# Altium PCB Circular PCB.PcbDoc (part 2 of 4)
Units mm, origin at the board's own origin, x right, y up, seen from the top; angles counter-clockwise.
Board outline 100 x 100 mm, 6 copper layers (Top Layer, GND (Top), X, Y, GND (Bot), Bottom Layer), stack 1.599 mm thick; 185 components, 119 nets, 581 pads, 159 vias.
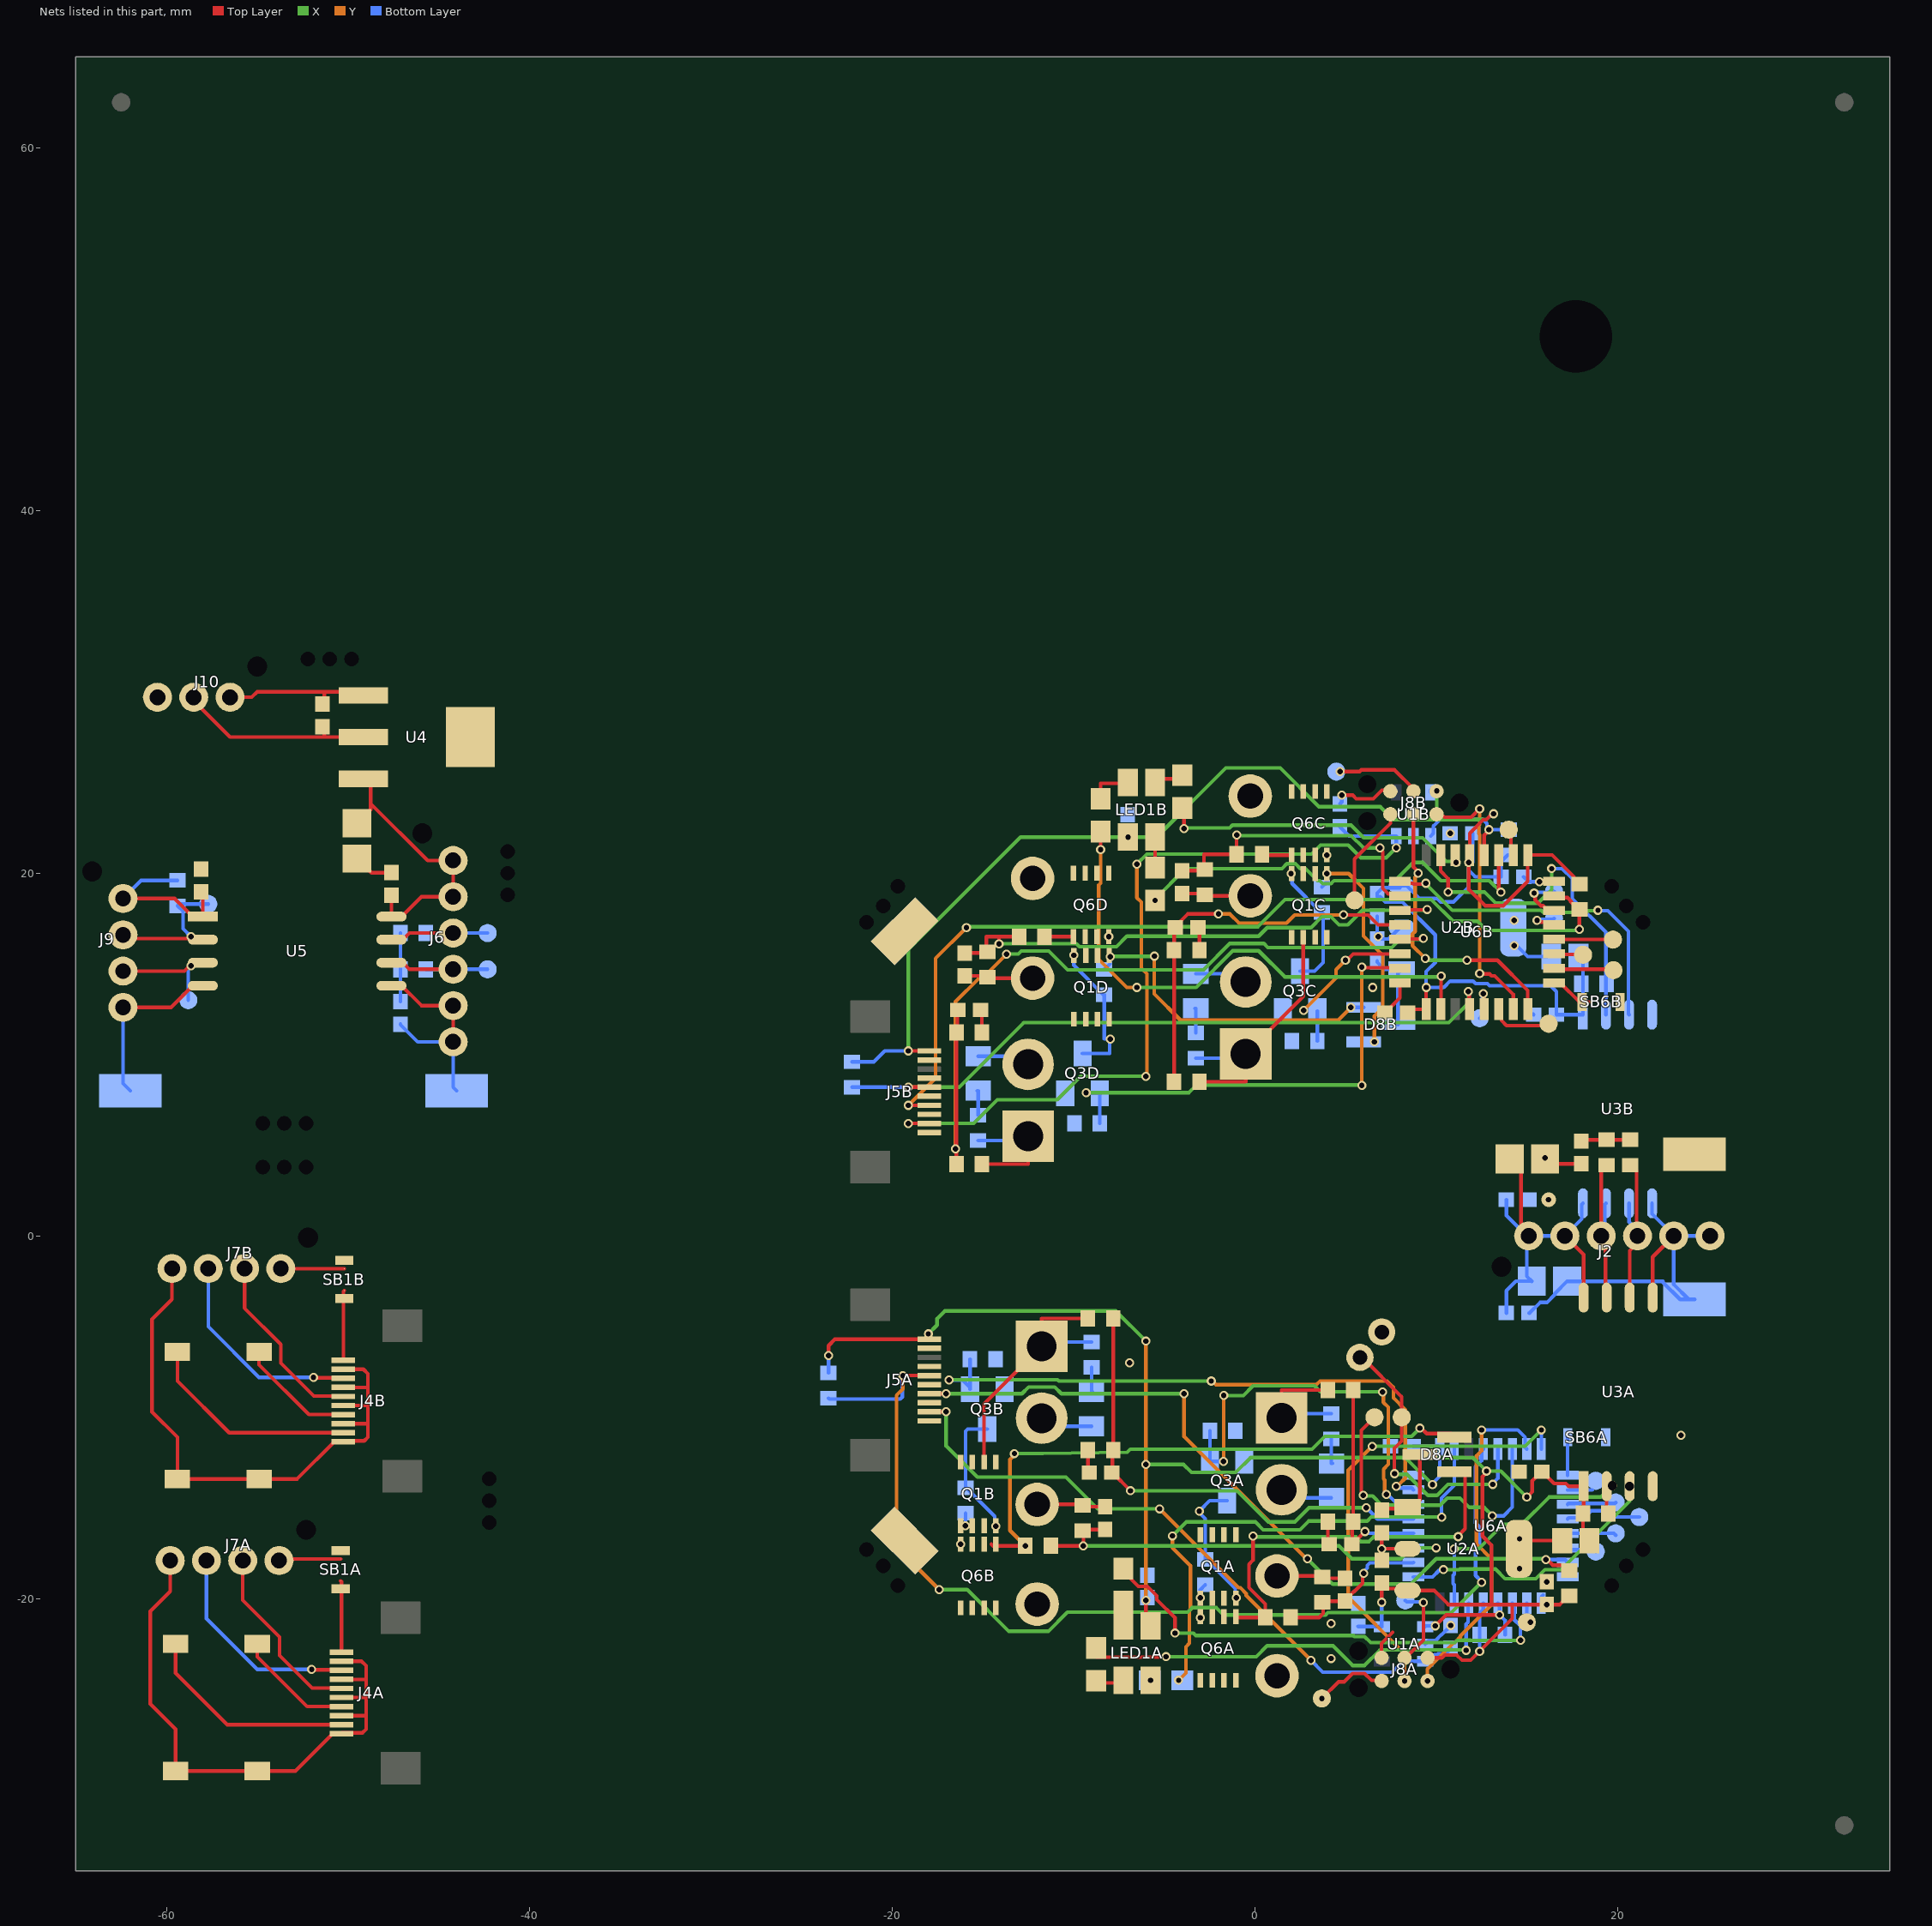
[diagram p6: the nets of this part, all layers, seen from the top]

## Part data
A1: library part "Misc PCB", "PCB (Bare Board)", Supplier Part Number 1="KDA Rev B", Class="PCB BOM Entry", Created=31/05/2013, Last_Updated=31/05/2013, Notes=-, Source="Misc PCB"
C1A C1B C2A C2B C3A C3B C5A C5B C7A C7B C8A C8B C9A C9B C10A C10B C11A C11B C12A C12B C12C C12D C13A C13B C13C C13D C14 C15 C16 C18 C19: library part FEC882-0023, "Capacitor MLC 100nF 50V X7R 10% CAPC1608X08M", Dielectric=X7R, Manufacturer=Murata, ManuPartNo=GRM188R71H104KA93D, Supplier Part Number 1=8820023, Tolerance=10%, Voltage=50V, Class="Capacitor MLC", Cost 1+=0.064, Cost 1K+=0.039, Created=25/01/2013, Last_Updated=25/01/2013, Life=V, RoHS=Y, Source=FEC882-0023, Supplier 1=Farnell
C4A C4B: library part FEC2494476, "Capacitor MLC 100uF 6.3V X5R 20% CAPC2012X15M", Dielectric=X5R, ManuPartNo=GRM21BR60J107ME15L, Supplier Part Number 1=2494476, Tolerance=20%, Voltage=6.3V, Class="Capacitor MLC", ComponentLink1Description=Datasheet, ComponentLink1URL="C:\Altium SANDBOX\Component Database\Datasheet\4459603.pdf", Cost 1+=0.829, Cost 1K+=0.341, Created=10/01/2026, Last_Updated=10/01/2026, Life=V, RoHS=Y, Source=FEC2494476, Supplier 1=Farnell
C6A C6B C17: library part Mouser81-GRM21BR71A106KE51, "Capacitor MLC 10uF10V X7R 10% CAPC2012X15M", Dielectric=X7R, Manufacturer=Murata, ManuPartNo=GRM21BR71A106KE51L, Supplier Part Number 1=81-GRM21BR71A106KE51, Tolerance=10%, Voltage=10V, Class="Capacitor MLC", Cost 1+=0.189, Cost 1K+=0.046, Created=21/12/2016, Last_Updated=21/12/2016, Life=V, RoHS=Y, Source=Mouser81-GRM21BR71A106KE51, Supplier 1=Mouser
D8A D8B: library part FEC146-7518, "Diode Schottky BAT54C SOT-23", Manufacturer=Fairchild, ManuPartNo=BAT54C, Supplier Part Number 1=1467518, Class="Diode Schottky", ComponentLink1Description=Datasheet, ComponentLink1URL="C:\Altium SANDBOX\Component Database\Datasheet\BAT54 Fairchild.pdf", Cost 1+=0.117, Cost 1K+=0.0297, Created=16/12/2013, If (mA)=200, Last_Updated=26/06/2018, Life=V, Ptot (mW)=290, RoHS=Y, Source=FEC146-7518, Supplier 1=Farnell, Vf=0.8V, Vr (V)=30V
FID1 FID2 FID3 FID4 FID5 FID6: library part "Misc FIDT", "Fiducial 1mm Dot Component Side", Supplier Part Number 1=FIDT, Class="Fiducial Dot", Created=31/05/2013, Last_Updated=31/05/2013, Source="Misc FIDT", Supplier 1=Misc
J1A J1B J1C J1D: library part FEC1756696, "Connector 2 Way Mini-Fit 5566 Series", Manufacturer=Molex, ManuPartNo=39-31-0020, Supplier Part Number 1=1756696, Class=Connector, ComponentLink1Description=Datasheet, ComponentLink1URL="C:\Altium SANDBOX\Component Database\Datasheet\39-31-0020.pdf", Cost 1+=0.39, Cost 1K+=0.283, Created=06/02/2018, Last_Updated=06/02/2018, Life=V, Orient=Vertical, Pin Count=2, RoHS=Y, Source=FEC1756696, Supplier 1=Farnell
J2 J6: library part FEC183-0743, "Connector 6 Way Vertical B06B-PASK-1 (LF) (SN) 2mm Pitch", Manufacturer=JST, ManuPartNo="B06B-PASK-1 (LF) (SN)", Supplier Part Number 1=1830743, Class=Connector, Cost 1+=0.55, Cost 1K+=0.2, Created=21/06/2013, Last_Updated=21/06/2013, Life=V, Orient=Vertical, Pin Count=6, Pitch=2mm, RoHS=Y, Source=FEC183-0743, Supplier 1=Farnell
J3A J3B J3C J3D: library part FEC949-2003, "Connector 2 Way Vertical JST B2P-VH(LF)(SN) 3.96mm Pitch", Manufacturer=JST, ManuPartNo=B2P-VH(LF)(SN), Supplier Part Number 1=9492003, Class=Connector, Cost 1+=0.128, Cost 1K+=0.074, Created=13/06/2013, Last_Updated=13/06/2013, Life=V, Orient#=Vertical, Pin Count=2, Pitch=3.96mm, RoHS=Y, Source=FEC949-2003, Supplier 1=Farnell
J4A J4B J5A J5B: library part FEC1324540, "Connector 10W FFC/FPC 0.5mm SM ZIF", Manufacturer=Hirose, ManuPartNo=FH12-10S-0.5SH(55), Supplier Part Number 1=1324540, Class=Connector, ComponentLink1Description=Datasheet, ComponentLink1URL="C:\Altium SANDBOX\Component Database\Datasheet\Hirose FH12 Series.pdf", Cost 1+=1.02, Cost 1K+=0.563, Created=28/02/2020, Last_Updated=28/02/2020, Life=V, Orient=Horizontal, Pin Count=10, RoHS=Y, Source=FEC1324540, Supplier 1=Farnell
J7A J7B J9: library part RS512-8608, "Connector 4 Way Vertical JST B04B-PASK-1 (LF) (SN) 2mm Pitch", Manufacturer=JST, ManuPartNo="B04B-PASK-1 (LF) (SN)", Supplier Part Number 1=512-8608, Class=Connector, Cost 1+=0.26, Cost 1K+=0.24, Created=05/06/2013, Last_Updated=05/06/2013, Life=V, Orient=Vertical, Pin Count=4, Pitch=2mm, RoHS=Y, Source=RS512-8608, Supplier 1=RSComponents
J8A J8B: library part TC2030-IDC-NL, "TC2030 Tag Connect Programmer Connection - Non BOM part", Manufacturer="Tag Connect", ComponentLink1Description=Datasheet, ComponentLink1URL="C:\Altium SANDBOX\Component Database\Datasheet\TC2030-CTX.pdf", Created=28/09/2025, Last_Updated=28/09/2025, Life=V, Orient=Vertical, Pin Count=6, RoHS=Y, Source=TC2030-IDC-NL
J10: library part FEC183-0736, "Connector 3 Way Vertical 2mm Pitch", Manufacturer=JST, ManuPartNo=B03B-PASK-1, Supplier Part Number 1=1830736, Class=Connector, Cost 1+=0.34, Cost 1K+=0.118, Created=09/08/2013, Last_Updated=09/08/2013, Life=V, Orient=Vertical, Pin Count=3, Pitch=2mm, RoHS=Y, Source=FEC183-0736, Supplier 1=Farnell
LED1A LED1B: library part FEC2401105, "LED RGB, SMD, 2.4mm, 115 °", Manufacturer=Wurth, ManuPartNo=ASMB-MTB0-0A3A2, Supplier Part Number 1=2401105, Class=LED, ComponentLink1Description=Datasheet, ComponentLink1URL="C:\Altium SANDBOX\Component Database\Datasheet\2343968.pdf", Cost 1+=0.278, Cost 1K+=0.141, Created=09/03/2018, IF Max (mA)=20, IF Typ (mA)=20, Last_Updated=09/03/2018, Life=V, RoHS=Y, Source=FEC2401105, Supplier 1=Farnell, View Angle=115
LED2A LED2B LED2C LED2D: library part RS692-0907, "LED 2.0x1.25mm GREEN 0805 LTST-C170KGKT", Manufacturer=Liteon, ManuPartNo=LTST-C170KGKT, Supplier Part Number 1=692-0907, Class="LED 0805 Green", ComponentLink1Description=Datasheet, ComponentLink1URL="C:\Altium SANDBOX\Component Database\Datasheet\LTST-C170KGKT.pdf", Cost 1+=0.169, Cost 1K+=0.071, Created=05/08/2013, IF Max (mA)=80, IF Typ (mA)=30, Last_Updated=05/08/2013, Life=V, RoHS=Y, Source=RS692-0907, Supplier 1=RSComponents, View Angle=130
Q1A Q1B Q1C Q1D Q6A Q6B Q6C Q6D: library part FEC3934789, "Power MOSFET, P Channel, 30 V, 15.2 A, 0.0111 ohm, MLPAK33, Surface Mount", Manufacturer=NEXPERIA, ManuPartNo=PXP012-30QLJ, Supplier Part Number 1=3934789, Class="Transistor MOSFET P", ComponentLink1Description=Datasheet, ComponentLink1URL="C:\Altium SANDBOX\Component Database\Datasheet\3679934.pdf", Cost 1+=0.598, Cost 1K+=0.207, Created=24/09/2025, Id=8.9, Last_Updated=24/09/2025, Life=V, Pd (mW)=1700, Rds(on)=0.0111, RoHS=Y, Source=FEC3934789, Supplier 1=Farnell, Vds=30, Vgs=25
Q3A Q3B Q3C Q3D: library part CMP-013-00021-3, "N-Channel Logic Level Enhancement Mode Field Effect Transistor, 220 mA, 50 V, -55 to 150 degC, 3-Pin SOT-23, RoHS, Tape and Reel", Case/Package=TO-236-3, Input Capacitance=27pF, Manufacturer=Fairchild, Max Operating Temperature=150°C, Min Operating Temperature=-55°C, Nominal Dual Supply Voltage=50V, Package Description="3-Pin Small Outline Transistor, Body 2.92 x 1.325 mm, Pitch 0.95 mm", Package Quantity=1, Package Reference=SOT23-3, Package Version="Rev. 12, 03/2016", Power=360mW, Resistance=0.7Ohm, Datasheet URL=https://www.fairchildsemi.com/datasheets/BS/BSS138.pdf, Datasheet Version="Rev. C, 10/2005", Elements=1, Mounting Technology=SM, Nominal Vgs=1.3V, Packaging=TapeandReel, Pins=3, Rds On Max=3.5Ohm, RoHS Compliant=True, Typical Rise Time=9ns
R1A R1B R1C R1D R4A R4B R4C R4D R10A R10B R12A R12B R12C R12D R15 R37A R37B: library part PanasonicERA3AEB103V, "SMD Chip Resistor, Thin Film, 10 kohm, 75 V, 0603 [1608 Metric], 100 mW, ± 0.1%, ERA3A Series", Manufacturer=Panasonic, ManuPartNo=ERA3AEB103V, Power=100mW, Supplier Part Number 1=1577619, Tolerance=0.1%, Voltage=75V, Class=Resistor, ComponentLink1Description=Datasheet, ComponentLink1URL="C:\Altium SANDBOX\Component Database\Datasheet\Panasonic Resistors.pdf", Cost 1+=0.237, Cost 1K+=0.053, Created=27/02/2018, Last_Updated=27/02/2018, Life=V, RoHS=Y, Source=PanasonicERA3AEB103V, Supplier 1=Farnell
R2A R2B R2C R2D R11A R11B R11C R11D: library part PanasonicERA3AEB303V, "SMD Chip Resistor, Thin Film, 30 kohm, 75 V, 0603 [1608 Metric], 100 mW, ± 0.1%, ERA3A Series", Manufacturer=Panasonic, ManuPartNo=ERA3AEB303V, Power=100mW, Supplier Part Number 1=1670196, Tolerance=0.1%, Voltage=75V, Class=Resistor, ComponentLink1Description=Datasheet, ComponentLink1URL="C:\Altium SANDBOX\Component Database\Datasheet\Panasonic Resistors.pdf", Cost 1+=0.0538, Cost 1K+=0.0349, Created=19/09/2025, Last_Updated=19/09/2025, Life=V, RoHS=Y, Source=PanasonicERA3AEB303V, Supplier 1=Farnell
R3A R3B R3C R3D: library part FEC2421849, "SMD Chip Resistor, Thick Film, 1 kohm, 50 V, 0603 [1608 Metric], 100 mW, ± 1%, RC Series", Manufacturer=Yageo, ManuPartNo=RC0603FR-071KL, Power=100mW, Supplier Part Number 1=2421849, Tolerance=1%, Voltage=50V, Class=Resistor, ComponentLink1Description=Datasheet, ComponentLink1URL="C:\Altium SANDBOX\Component Database\Datasheet\Yageo RC_L Series.pdf", Cost 1+=0.002, Cost 1K+=0.001, Created=22/05/2018, Last_Updated=22/05/2018, Life=V, RoHS=Y, Source=FEC2421849, Supplier 1=Farnell
R5A R5B R6A R6B: library part FEC933-1174, "Resistor 39R 1% 50V RESC1608X06M", Manufacturer=Multicomp, ManuPartNo="MC 0.063W 0603 1% 39R", Supplier Part Number 1=9331174, Tolerance=1%, Voltage=50V, Class=Resistor, Cost 1+=0.021, Cost 1K+=0.015, Created=23/01/2013, Last_Updated=23/01/2013, Life=V, RoHS=Y, Source=FEC933-1174, Supplier 1=Farnell
R7A R7B: library part FEC933-0860, "Resistor 240R 1% 50V RESC1608X06M", Manufacturer=Multicomp, ManuPartNo="MC 0.063W 0603 1% 240R", Supplier Part Number 1=9330860, Tolerance=1%, Voltage=50V, Class=Resistor, Cost 1+=0.021, Cost 1K+=0.015, Created=23/01/2013, Last_Updated=23/01/2013, Life=V, RoHS=Y, Source=FEC933-0860, Supplier 1=Farnell
R8A R8B R9A R9B: library part FEC933-1247, "Resistor 4K7 1% 50V RESC1608X06M", Manufacturer=Multicomp, ManuPartNo="MC 0.063W 0603 1% 4K7", Supplier Part Number 1=9331247, Tolerance=1%, Voltage=50V, Class=Resistor, Cost 1+=0.021, Cost 1K+=0.015, Created=23/01/2013, Last_Updated=23/01/2013, Life=V, RoHS=Y, Source=FEC933-1247, Supplier 1=Farnell
R13 R14 R16 R17: library part Mouser603-RC0603FR-0762RL, "SMD Chip Resistor, Thick Film, 62 ohm, 75V, 0603 [1608 Metric], 100mW, ± 1%, RC Series", Manufacturer=Yageo, ManuPartNo=RC0603FR-0762RL, Power=100mW, Supplier Part Number 1=603-RC0603FR-0762RL, Tolerance=1%, Voltage=75V, Class=Resistor, ComponentLink1Description=Datasheet, ComponentLink1URL="C:\Altium SANDBOX\Component Database\Datasheet\Yageo RC_L Series.pdf", Cost 1+=0.074, Cost 1K+=0.002, Created=08/06/2018, Last_Updated=08/06/2018, Life=V, RoHS=Y, Source=Mouser603-RC0603FR-0762RL, Supplier 1=Mouser
R22A R22B R22C R22D: library part FEC933-1344, "Resistor 560R 1% 50V RESC1608X06M", Manufacturer=Multicomp, ManuPartNo="MC 0.063W 0603 1% 560R", Supplier Part Number 1=9331344, Tolerance=1%, Voltage=50V, Class=Resistor, Cost 1+=0.021, Cost 1K+=0.015, Created=23/01/2013, Last_Updated=23/01/2013, Life=V, RoHS=Y, Source=FEC933-1344, Supplier 1=Farnell
SB1A SB1B SB6A SB6B: library part "Solder Blob Open", "Solder Blob - Open 0603 SM pads", Created=13/10/2017, Last_Updated=13/10/2017, Life=V, Pin Count=2, RoHS=Y, Source="Solder Blob Open"
SW1A SW1B SW2A SW2B: library part FEC120-1422, "Switch SMD SPST-NO Vertical ITT/Cannon KSR231GLFS", Manufacturer=ITT/Cannon, ManuPartNo=KSR231GLFS, Supplier Part Number 1=1201422, Class="Switch SMD", Cost 1+=0.77, Cost 1K+=0.54, Created=18/09/2013, Last_Updated=18/09/2013, Life=V, Orient=Vertical, RoHS=Y, Source=FEC120-1422, Supplier 1=Farnell, Switch Type=SPST-NO
TP1A TP1B TP2A TP2B TP16A TP16B TP21 TP22: library part FEC2293786, "PCB Test Point S1751 Series, Surface Mount", Manufacturer=Harwin, ManuPartNo=S1751-46R, Supplier Part Number 1=2293786, Class=Connector, ComponentLink1Description=Datasheet, ComponentLink1URL="C:\Altium SANDBOX\Component Database\Datasheet\S1751-46R.pdf", Cost 1+=0.134, Cost 1K+=0.106, Created=16/10/2017, Last_Updated=01/12/2017, Life=V, Orient=Vertical, Pin Count=1, RoHS=Y, Source=FEC2293786, Supplier 1=Farnell
TP3A TP3B TP4A TP4B TP5A TP5B TP6A TP6B TP7A TP7B TP8A TP8B TP9A TP9B TP10A TP10B TP11A TP11B TP13A TP13B TP17 TP18 TP19 TP20: library part "Misc TP1", "Testpoint 1mm dia. Component side, no silk", Supplier Part Number 1=TP1, Class=Testpoint, Created=26/01/2013, Last_Updated=26/01/2013, Source="Misc TP1", Supplier 1=Misc
U1A U1B: library part FEC845-7255, "IC Supply Voltage Monitor, 2.93V TPS3828-33DBVT SOT23-5", Manufacturer=Texas, ManuPartNo=TPS3828-33DBVT, Supplier Part Number 1=8457255, Class="IC Sensor", ComponentLink1Description=Datasheet, ComponentLink1URL="C:\Altium SANDBOX\Component Database\Datasheet\TPS3828.pdf", Cost 1+=1.08, Cost 1K+=0.73, Created=10/06/2013, Last_Updated=10/06/2013, Life=V, RoHS=Y, Source=FEC845-7255, Supplier 1=Farnell
U2A U2B: library part CMP-06324-000085-1, "IC REG LIN 3.3V 100MA SOT223-3", Case/Package=SOT-223, Dropout Voltage=230mV, Max Input Voltage=26V, Max Operating Temperature=125°C, Min Current Limit=100mA, Min Input Voltage=2.5V, Min Operating Temperature=-40°C, Nominal Output Voltage=3.3V, Lead Free="Lead Free", Mount="Surface Mount", Number of Pins=3, Number of Regulators=1, Output Current=100mA, Output Type=Fixed, Output Voltage=3.3V, Packaging=Rail/Tube, REACH SVHC="No SVHC"
U3A U3B U5: library part CMP-04872-000132-1, "IC TRANSCEIVER FULL 1/1 8SOIC", Manuf Part No=ISO1042DWV, RoHS Compliant=Yes
U4: library part FEC210-0330, "IC Regulator LDO MIC5239-5.0YS SOT-223", Manufacturer=Micrel, ManuPartNo=MIC5239-5.0YS, Supplier Part Number 1=2100330, Class="IC LDO Regulator", ComponentLink1Description=Datasheet, ComponentLink1URL="C:\Altium SANDBOX\Component Database\Datasheet\MIC5239.pdf", Cost 1+=3.22, Cost 1K+=1.3, Created=23/01/2014, Last_Updated=23/01/2014, Life=V, RoHS=Y, Source=FEC210-0330, Supplier 1=Farnell
U6A U6B: library part CMP-12105-000012-1, "IC MCU 32BIT 16KB FLASH 32LQFP", Ambient Temperature Range High=+85°C, Ambient Temperature Range Low=-40°C, Frequency=32MHz, Manufacturer=STMicroelectronics, Manufacturer Part Number=STM32L011K4T6, Max Junction Temp=+105°C, Max Supply Voltage=3.6V, Min Supply Voltage=1.65V, Nominal Supply Current=500-1500uA, Package=LQFP32-5V, Temperature="-40°C to +85°C", Automotive=No, Category=IC, ComponentLink2Description=Datasheet, ComponentLink2URL=https://www.st.com/content/ccc/resource/technical/document/datasheet/42/c0/ab/e5/71/7a/47/0b/DM00206508.pdf/files/DM00206508.pdf/jcr:content/translations/en.DM00206508.pdf, Core Architecture="Arm Cortex-M0+", Data Bus Width=32bits, Device Class L1="Integrated Circuits (ICs)", Device Class L2="Embedded Processors and Controllers", Device Class L3=Microcontrollers, Digikey Description="IC MCU 32BIT 16KB FLASH 32LQFP", Height=1.6mm, Interface=I2C,SPI,UART,USART,IrDA, Ipc Land Pattern Name=QFP80P900X900X160-32, Lead Free=Yes, Memory Size=16KBytes, Memory Type=FLASH, Mouser Description="ARM Microcontrollers - MCU Ultra-low-power ARM Cortex-M0+ MCU with 16-Kbytes Flash, 32 MHz CPU", Number Of A/D Converters=1, Number Of Adc Channels=10, Number Of Cores=1, Number Of I2C Channels=1, Number of I/Os=26, Number Of Spi Channels=1, Number Of Timers/Counters=8, Number Of Uart Channels=2, Octopart=https://octopart.com/stm32l011k4t6-stmicroelectronics-71108062, Ram Size=2KBytes, RoHS=TRUE, Standoff Height=0.05mm, Temperature Range High=+85°C, Temperature Range Low=-40°C
Z1 Z2 Z4 Z5 Z6: library part "Misc_Breakout - 3 hole - short route", "Breakout - 3 hole - short route", Class="Free pads", Created=14/12/2020, Last_Updated=14/12/2020, Source="Misc_Breakout - 3 hole - short route", Supplier 1=Misc

## Free pads (board coordinates)
  round 0 hole 0.8: 0(-21.4,-17.3) 0(-21.4,17.3) 0(-20.475,-18.2) 0(-20.475,18.2) 0(-19.684,-19.273) 0(-19.684,19.273) 0(19.684,-19.273) 0(20.475,-18.2) 0(21.4,-17.3) breakout(19.684,19.273) breakout(20.475,18.2) breakout(21.4,17.3)
  round 1.5 hole 0.8: 1(5.8,-6.7) 1(7,-5.3)
  round 0 hole 4: 1(17.7,49.6)

## Via types
v1: diameter 0.5, hole 0.3, Top Layer to Bottom Layer, tented both sides, 155 vias
v2: diameter 0.5, hole 0.5, Top Layer to Bottom Layer, tented both sides, 2 vias
v3: diameter 0.8, hole 0.3, Top Layer to Bottom Layer, tented both sides, 2 vias

## Nets (pads, with @x,y where several pads share a name; then routed paths per layer and width w, separated by ;. In a path a pad name is that pad's centre, name@x,y a point inside that pad or via, vN(x,y) a via of type N, cw(c..) or ccw(c..) an arc to the next point about the centre after c; other vN are vias at no path point)
3V3: C18.1 J9.1 R15.2 U5.1 | length 9.6
  Top Layer w0.2: J9.1@-62.4,18.6 -59.551,18.6 -58.556,17.605 U5.1@-58.001,17.605 -58.001,18.876 C18.1@-58.1,18.975
  Bottom Layer w0.2: J9.1@-62.4,18.6 -61.4,19.6 R15.2@-59.4,19.6
3V3A: C1A.1 C3A.1 C4A.1 C7A.1 C9A.1 C10A.1 C11A.1 J5A.1 J8A.1 LED1A.1 R8A.2 R9A.2 R10A.2 R37A.2 U1A.5 U2A.3 U3A.1 U6A.1 U6A.5 U6A.17 | length 104.8
  Top Layer w0.2: v1(-23.5,-6.6) -23.5,-6.05 -23.15,-5.7 J5A.1@-17.95,-5.7 -18,-5.65 v1(-18,-5.4) ; v1(-6,-20.1) -6,-21.25 LED1A.1@-5.75,-21.5 ; v1(7,-20.2) C3A.1@7,-19.125 ; C3A.1@7,-19.15 7.25,-19.4 7.275,-19.4 7.314,-19.439 8.314,-19.439 U2A.3@8.425,-19.55 9.89,-19.55 10.665,-20.325 13.05,-20.325 ; U2A.3@8.299,-19.575 U2A.3@8.4,-19.575 ; J8A.1@9.53,-23.265 10.307,-23.265 10.47,-23.103 11.13,-23.103 11.425,-23.397 11.903,-23.397 v1(12.4,-22.9) 14.2,-21.1 14.2,-20.325 ; v1(12.776,-12.967) 12.776,-13.049 12.551,-13.274 12.551,-16.55 13.05,-17.049 13.05,-20.325 ; v1(15,-14.4) 15.3,-14.1 15.3,-13.5 C7A.1@15.8,-13 ; C7A.1@15.825,-13 15.85,-13 16.5,-13.65 17.154,-13.65 17.305,-13.801 U3A.1@18.13,-13.801 R10A.2@18.13,-15.3 ; R9A.2@17.35,-19.85 17.3,-19.85 16.825,-20.325 v1(16.1,-20.325) 14.2,-20.325 ; R10A.2@18.1,-15.3 18.1,-16.45 C4A.1@18.45,-16.8 ; 13.05,-20.325 14.2,-20.325
  X w0.2: v1(-18,-5.4) -17.516,-4.916 -17.516,-4.566 -17.09,-4.14 -7.66,-4.14 v1(-6,-5.8) ; v1(-6,-12.6) -3.93,-12.6 -3.492,-13.037 -1.048,-13.037 -0.235,-12.225 8.316,-12.225 ; v1(9.798,-13.707) 8.316,-12.225 ; v1(15,-14.4) 13.567,-12.967 v1(12.776,-12.967) 12.034,-12.225 8.316,-12.225
  Y w0.2: v1(-6,-20.1) v1(-6,-12.6) v1(-6,-5.8)
  Bottom Layer w0.2: R37A.2@-23.5,-7.55 v1(-23.5,-6.6) ; C10A.1@5.7,-21.525 5.712,-21.537 6.987,-21.537 U1A.5@7,-21.55 v1(7,-20.2) ; C1A.1@8.725,-11.6 10.1,-11.6 10.2,-11.7 U6A.17@10.2,-11.75 10.2,-13.251 9.798,-13.653 v1(9.798,-13.707) ; v1(12.4,-22.9) R8A.2@12.4,-22 12.4,-20.8 12.6,-20.6 U6A.5@12.6,-20.25 ; U6A.1@15.8,-20.25 15.8,-19.9 U6A.1@15.9,-19.8
3V3B: C1B.1 C3B.1 C4B.1 C7B.1 C9B.1 C10B.1 C11B.1 J5B.1 J8B.1 LED1B.1 R8B.2 R9B.2 R10B.2 R37B.2 U1B.5 U2B.3 U3B.1 U6B.1 U6B.5 U6B.17 | length 98.8
  Top Layer w0.2: v1(-19.1,10.2) J5B.1@-17.95,10.2 ; C1B.1@8.425,12.3 8.625,12.5 U6B.17@9.45,12.5 v1(9.45,13.7) ; J8B.1@10.02,24.52 v1(10.032,24.532) ; v1(11.8,20.591) 11.8,19.1 12.7,18.2 13.7,18.2 15.05,19.55 U6B.1@15.05,21 16.395,21 17.6,19.795 17.6,19.65 17.85,19.4 R9B.2@17.9,19.4 ; U6B.5@11.85,21 11.85,22.199 12.591,22.939 12.758,22.939 13.093,23.275 v1(13.175,23.275)
  X w0.2: v1(-19.1,10.2) -19.1,15.8 -12.912,21.988 v1(-6.987,21.988) -5.412,21.988 -1.6,25.8 1.4,25.8 3.534,23.666 6.922,23.666 7.638,22.95 10,22.95 ; v1(10.032,24.532) 10.032,22.982 10,22.95 ; v1(13.175,23.275) 13.093,23.275 12.769,22.95 10,22.95
  Bottom Layer w0.2: R37B.2@-22.2,9.6 -21,9.6 -20.4,10.2 v1(-19.1,10.2) ; U1B.5@9.7,24.45 U1B.5@9.7,24.6 ; C10B.1@12.025,22.2 12.025,20.591 v1(11.8,20.591) 11.8,20.1 ; C9B.1@13.463,19.8 12.154,19.8 11.854,20.1 11.8,20.1 ; C9B.1@13.575,19.8 13.575,20.625 13.95,21 R8B.2@14,21 ; C4B.1@18.075,15.4 18.095,15.38 U3B.1@18.095,12.201 ; U3B.1@18.094,12.2 C7B.1@16.625,12.2 16.625,13.475 16.3,13.8 12.939,13.8 12.828,13.911 12.172,13.911 12.036,14.048 10.774,14.048 10.427,13.7 v1(9.45,13.7) 9.45,14.572 9.95,15.072 9.95,16.599 8.149,18.4 7.2,18.4 6.9,18.7 6.75,18.7 C3B.1@6.75,18.875 6.75,18.9 7.05,19.2 8,19.2 U2B.3@8.1,19.3 8.386,19.3 9.086,18.6 10.059,18.6 10.244,18.415 10.955,18.415 11.8,19.259 11.8,20.1
9V_BATT: C15.1 J10.1 U4.1 | length 8.7
  Top Layer w0.2: J10.1@-56.5,29.7 -55.3,29.7 -55,30 -51.3,30 ; C15.1@-51.4,29.325 -51.3,29.425 -51.3,30 ; U4.1@-48.75,29.8 -48.95,30 -51.3,30
BOOT0A: J5A.7 R9A.1 U6A.31 | length 43.5
  Top Layer w0.2: J5A.7@-17.95,-8.7 v1(-17.017,-8.7) ; v1(16.047,-17.847) 16.129,-17.847 16.431,-18.15 17.05,-18.15 R9A.1@17.35,-18.45
  X w0.2: v1(-17.017,-8.7) -12.836,-8.7 -12.463,-8.328 -11.037,-8.328 -10.664,-8.7 v1(-3.9,-8.7) ; v1(2.9,-17.8) 4.3,-19.2 8.6,-19.2 10,-17.8 16,-17.8 v1(16.047,-17.847)
  Y w0.2: v1(-3.9,-8.7) -3.9,-11.058 2.842,-17.8 v1(2.9,-17.8)
  Bottom Layer w0.2: v1(16.047,-17.847) 16.597,-17.847 16.6,-17.85 17.1,-17.85 U6A.31@17.25,-18 U6A.31@17.3,-17.95
BOOT0B: J5B.7 R9B.1 U6B.31 | length 50.2
  Top Layer w0.2: v1(-19.1,7.2) J5B.7@-17.95,7.2 ; U6B.31@16.5,18.75 16.6,18.65 17.249,18.65 17.425,18.474 17.425,18.425 R9B.1@17.85,18 ; v1(17.9,16.9) R9B.1@17.9,18
  X w0.2: v1(-15.9,17) -15.85,17.05 0.171,17.05 1.671,18.55 9.728,18.55 10.927,17.351 12.275,17.351 12.776,16.85 17.85,16.85 v1(17.9,16.9)
  Y w0.2: v1(-19.1,7.2) -17.6,8.7 -17.6,15.3 v1(-15.9,17)
CANHA: J2.3 R13.2 U3A.7 U3B.7 | length 9.5
  Top Layer w0.2: U3A.7@19.4,-3.4 19.335,-3.335 19.335,-0.235 J2.3@19.1,0 19.1,3.6 R13.2@19.4,3.9
  Bottom Layer w0.2: J2.3@19.1,0 19.3,0.2 19.3,1.734 U3B.7@19.365,1.799
CANLA: J2.4 R14.2 U3A.6 U3B.6 | length 9.7
  Top Layer w0.2: U3A.6@20.67,-3.4 20.67,-0.809 21.1,-0.379 J2.4@21.1,0 21.05,0.05 21.05,3.6 20.75,3.9 R14.2@20.7,3.9
  Bottom Layer w0.2: U3B.6@20.635,1.799 20.635,0.764 21.1,0.299 J2.4@21.1,0
GND: C18.2 J9.4 TP21.1 U5.4 | length 9.7
  Top Layer w0.2: J9.4@-62.4,12.6 -59.751,12.6 -58.556,13.795 U5.4@-58.001,13.795
  Bottom Layer w0.2: J9.4@-62.4,12.6 -62.4,8.4 TP21.1@-62,8
GNDA: C1A.2 C2A.2 C3A.2 C4A.2 C7A.2 C8A.2 C9A.2 C10A.2 C11A.2 C12A.2 C12B.2 C13A.2 C13B.2 J1A.2 J1B.2 J3A.2 J3B.2 J5A.2 J5A.4 J5A.6 J5A.8 J5A.10 J8A.5 LED2A.1 LED2B.1 pad.1@7,-5.3 Q3A.2 Q3B.2 Q6A.4 Q6B.4 R3A.1 R3B.1 R4A.1 R4B.1 R12A.1 R12B.1 SB6A.1 TP1A.1 TP2A.1 U1A.2 U2A.2 U2A.4 U3A.4 U6A.16 U6A.32 | length 26
  Top Layer w0.2: J1B.2@-12,-14.8 -9.45,-14.8 R4B.1@-9.45,-14.89 ; R4B.1@-9.55,-14.89 -9.55,-14.925 C12B.2@-8.25,-14.925 ; R12B.1@-9.2,-11.8 -9.2,-13.09 C13B.2@-9.15,-13.09 ; J1A.2@1.225,-18.747 3.775,-18.747 R4A.1@3.775,-18.837 ; R4A.1@3.675,-18.837 3.675,-18.872 C12A.2@4.975,-18.872 ; R12A.1@4.025,-15.747 4.025,-17.037 C13A.2@4.075,-17.037 ; J8A.5@6.98,-23.265 6.98,-22.47 7.6,-21.85 ; C3A.2@7,-17.875 v1(7,-17.25) ; C2A.2@7,-16.375 v1(7,-17.25) ; U2A.2@8.425,-17.25 v1(7,-17.25) ; v1(14.6,-16.7) 14.7,-16.8 C4A.2@16.95,-16.8
  Bottom Layer w0.2: J3B.2@-11.65,-9.89 -11.65,-10.5 LED2B.1@-9,-10.5 ; J3A.2@1.575,-13.837 1.575,-14.447 LED2A.1@4.225,-14.447 ; U1A.2@9.4,-22.5 9.6,-22.3 9.976,-22.3 10.276,-22 10.3,-22 10.8,-21.5 v1(10.8,-21.475)
  other v1: 4.2,-23.3 4.2,-21.375 -3.002,-21.05 16.1,-19.075 14.6,-18.35 -16.225,-17 23.5,-11 -6.9,-7
GNDB: C1B.2 C2B.2 C3B.2 C4B.2 C7B.2 C8B.2 C9B.2 C10B.2 C11B.2 C12C.2 C12D.2 C13C.2 C13D.2 J1C.2 J1D.2 J3C.2 J3D.2 J5B.2 J5B.4 J5B.6 J5B.8 J5B.10 J8B.5 LED2C.1 LED2D.1 Q3C.2 Q3D.2 Q6C.4 Q6D.4 R3C.1 R3D.1 R4C.1 R4D.1 R12C.1 R12D.1 SB6B.1 TP1B.1 TP2B.1 U1B.2 U2B.2 U2B.4 U3B.4 U6B.16 U6B.32 | length 29.3
  Top Layer w0.2: C12D.2@-16,14.335 -14.7,14.335 R4D.1@-14.7,14.3 ; C13D.2@-15.1,12.5 -15.05,12.5 R12D.1@-15.05,11.21 ; R4D.1@-14.8,14.3 -14.8,14.21 J1D.2@-12.25,14.21 ; C12C.2@-4,18.875 -2.7,18.875 R4C.1@-2.7,18.84 ; C13C.2@-3.1,17.04 -3.05,17.04 R12C.1@-3.05,15.75 ; R4C.1@-2.8,18.84 -2.8,18.75 J1C.2@-0.25,18.75 ; v1(4.8,24.3) 5.397,24.3 5.594,24.104 6.54,24.104 7.007,24.571 7.429,24.571 J8B.5@7.48,24.52 ; C1B.2@7.175,12.3 7.2,12.3 7.5,12.6 7.5,12.625 8,13.125 U6B.16@8,13.95 ; v1(15.704,19.531) 15.714,19.54 16.49,19.54 U6B.32@16.5,19.55
  Bottom Layer w0.2: LED2D.1@-15.25,9.91 -12.6,9.91 J3D.2@-12.6,9.3 ; LED2C.1@-3.25,14.45 -0.6,14.45 J3C.2@-0.6,13.84 ; C8B.2@4.7,23.825 4.8,23.925 v1(4.8,24.3) ; C3B.2@6.75,17.625 C2B.2@6.75,16.375 7.374,16.375 U2B.2@7.999,17 ; v1(14.3,16) 14.45,16 15.05,15.4 C4B.2@16.125,15.4 ; C9B.2@14.825,19.8 15.094,19.531 v1(15.704,19.531) ; C7B.2@15.35,12.225 C7B.2@15.375,12.2
  other v1: 6.5,13.7 -8.05,16.497 6.8,16.5 14.3,17.4 3.975,20.997 10.775,22.2
ISO_5V: C16.1 C17.1 J6.1 J6.2 U4.3 U5.8 | length 15.7
  Top Layer w0.2: C17.1@-49.5,22.75 -49.475,22.75 -48.8,23.425 -48.8,23.45 -48.75,23.5 -48.75,23.848 ; U4.3@-48.75,25.2 -48.75,23.848 ; C16.1@-47.6,18.775 U5.8@-47.599,17.605 -47.044,17.605 -45.949,18.7 J6.2@-44.2,18.7 J6.1@-44.2,20.7 -45.602,20.7 -48.75,23.848
ISO_5VA: C5A.1 C5B.1 C6A.1 C6B.1 J2.1 J2.2 U3A.8 U3B.8 | length 20.6
  Top Layer w0.2: C6B.1@14.05,4.25 14.675,3.625 14.675,0.677 15,0.352 J2.1@15,0 ; J2.2@17.1,0 18.13,-1.03 U3A.8@18.13,-3.4
  Bottom Layer w0.2: C5A.1@13.875,-4.25 13.875,-3.021 14.397,-2.5 C6A.1@15.275,-2.5 15,-2.225 15,0 13.875,1.125 C5B.1@13.875,2 C5B.1@13.878,2.003 ; J2.1@15.1,0 J2.2@17.1,0 18.03,0.93 18.03,1.734 U3B.8@18.095,1.799
ISO_GND: C15.2 C16.2 C17.2 C19.2 J6.5 J6.6 J10.2 J10.3 TP22.1 U4.2 U4.4 U5.5 | length 26.1
  Top Layer w0.2: J10.2@-59,30 -56.5,27.5 U4.2@-48.75,27.5 ; C15.2@-51.4,28.075 -51.3,27.975 -51.3,27.5 ; C17.2@-49.5,20.8 -49.475,20.8 -48.7,20.025 C16.2@-47.6,20.025 ; U5.5@-47.599,13.795 -47.044,13.795 -45.949,12.7 J6.5@-44.2,12.7 J6.6@-44.2,10.7
  Bottom Layer w0.2: C19.2@-47.1,11.675 -47.1,11.65 -46.15,10.7 J6.6@-44.2,10.7 -44.2,8.2 TP22.1@-44,8
ISO_GNDA: C5A.2 C5B.2 C6A.2 C6B.2 C14.2 J2.5 J2.6 TP16A.1 TP16B.1 U3A.5 U3B.5 | length 24.5
  Top Layer w0.2: C6B.2@16,4.25 16.275,3.975 C14.2@18,3.975 ; U3A.5@21.94,-3.4 21.94,-1.16 J2.5@23.1,0
  Bottom Layer w0.2: C5A.2@15.125,-4.25 15.15,-4.25 15.733,-3.667 16.107,-3.667 16.55,-3.224 16.55,-3.175 C6A.2@17.225,-2.5 22.5,-2.5 22.5,-2.55 23.45,-3.5 TP16A.1@23.925,-3.5 ; U3B.5@21.905,1.799 21.905,1.219 23.1,0.024 J2.5@23.1,0 ; TP16A.1@24.25,-3.5 TP16A.1@23.925,-3.5 ; J2.6@25.1,0 J2.5@23.1,0 ; J2.5@23.1,0 23.1,-2.675 TP16A.1@23.925,-3.5
  other v3: 16.2,2 16,4.3
LED_BLUEA: R5A.1 U6A.18 | length 28.3
  X w0.2: v1(-4.539,-16.539) -3.77,-15.77 0.034,-15.77 0.464,-16.2 2.486,-16.2 2.962,-15.724 6.19,-15.724 6.414,-15.5 v1(10.3,-15.5)
  Y w0.2: v1(-4.539,-16.539) -4.539,-17.191 -3.55,-18.179 -3.55,-20.603 -3.602,-20.655 -3.602,-22.457 -3.8,-22.655 -3.8,-24.1 v1(-4.2,-24.5)
  Bottom Layer w0.2: v1(10.3,-15.5) 10.3,-14.45 11,-13.75 U6A.18@11,-11.75
LED_BLUEB: R5B.1 U6B.18 | length 30.1
  Top Layer w0.2: v1(-8.5,21.3) R5B.1@-8.5,22.3 R5B.1@-8.5,22.5 ; U6B.18@10.25,12.5 10.275,12.525 v1@10.275,14.325
  X w0.2: v1(-6.5,13.7) -3.236,13.7 -1.213,15.722 0.213,15.722 1.658,14.278 10.227,14.278 v1(10.274,14.326)
  Y w0.2: v1(-8.5,21.3) -8.5,19.444 -8.6,19.344 -8.6,15.8 -8.6,15.245 -7.055,13.7 v1(-6.5,13.7)
LED_GREENA: R6A.1 U6A.6 | length 24.1
  Top Layer w0.2: R6A.1@-8.75,-22.925 R6A.1@-8.725,-22.9 ; R6A.1@-8.725,-23.225 -4.925,-23.225 v1(-4.9,-23.2)
  X w0.2: v1(-4.9,-23.2) 0.08,-23.2 0.68,-22.6 4.308,-22.6 5.39,-23.681 6.05,-23.681 6.907,-22.825 11.631,-22.825 v1(11.653,-22.847)
  Bottom Layer w0.2: v1(11.653,-22.847) 11.65,-22.844 11.65,-21.405 11.755,-21.3 11.755,-20.295 U6A.6@11.8,-20.25
LED_GREENB: R6B.1 U6B.6 | length 17.8
  Top Layer w0.2: R6B.1@-4,23.8 -3.9,23.7 v1(-3.9,22.452) ; U6B.6@11.05,21 11.05,20.641 v1(11.1,20.591)
  X w0.2: v1(-3.9,22.452) -3.852,22.5 -1.378,22.5 -1.228,22.65 0.802,22.65 0.804,22.652 1.591,22.652 1.592,22.65 5.301,22.65 6.001,21.95 9.25,21.95 10.552,20.648 11.043,20.648 v1(11.1,20.591)
LED_REDA: R7A.1 U6A.3 | length 26.4
  Top Layer w0.2: R7A.1@-7.25,-18.55 -7.2,-18.55 -6.424,-19.326 -5.926,-19.326 -5.4,-19.851 -5.4,-20.055 -4.4,-21.055 v1(-4.4,-21.9)
  X w0.2: v1(-4.4,-21.9) -3.384,-21.9 -3.25,-22.035 5.432,-22.035 5.484,-22.087 6.05,-22.087 6.389,-22.425 11.028,-22.425 11.153,-22.3 11.422,-22.3 11.425,-22.297 11.881,-22.297 11.883,-22.3 v1(14.65,-22.3)
  Bottom Layer w0.2: U6A.3@14.2,-20.25 14.3,-20.35 14.3,-21.155 14.65,-21.505 v1(14.65,-22.3)
LED_REDB: R7B.1 U6B.3 | length 23.9
  Top Layer w0.2: v1(-5.5,18.5) -5.45,18.55 R7B.1@-5.45,18.7 ; U6B.3@13.45,21 13.45,19.128 13.573,19.004 v1(13.573,18.95)
  X w0.2: v1(-5.5,18.5) -5.5,18.577 -3.827,20.25 1.497,20.25 1.772,20.525 2.228,20.525 2.503,20.25 2.8,20.25 3.459,19.591 3.581,19.591 3.747,19.425 4.203,19.425 4.369,19.591 7.731,19.591 8.734,20.594 9.255,20.594 10.258,19.591 12.933,19.591 v1(13.573,18.95)
LPUART1_RXA: U3A.3 U6A.9 | length 14.9
  X w0.2: v1(10.4,-18.4) 11.276,-18.4 11.308,-18.368 13.268,-18.368 13.8,-18.9 15.497,-18.9 16,-18.397 16.893,-18.397 20.67,-14.62 v2(20.67,-13.801)
  Bottom Layer w0.2: U6A.9@8.75,-18.8 9.8,-18.8 10.162,-18.438 10.362,-18.438 v1(10.4,-18.4)
LPUART1_RXB: U3B.3 U6B.9 | length 18.5
  Top Layer w0.2: U6B.9@8,19.55 8.1,19.45 8.701,19.45 8.758,19.394 9.335,19.394 9.384,19.443 v1(9.438,19.443)
  X w0.2: v1(9.438,19.443) 9.438,19.405 10.893,17.95 15.792,17.95 15.907,17.835 18.271,17.835 18.371,17.935 18.9,17.935 v1(18.921,17.957)
  Bottom Layer w0.2: v1(18.921,17.957) 18.949,17.929 19.471,17.929 20.6,16.8 20.6,12.236 U3B.3@20.635,12.201
LPUART1_TXA: R10A.1 U3A.2 U6A.7 | length 15.1
  Top Layer w0.2: R10A.1@19.5,-15.3 19.4,-15.2 U3A.2@19.4,-13.801 19.432,-13.769 v2(19.711,-13.769)
  X w0.2: v1(11,-17.25) 12.35,-17.25 13.7,-15.9 14.726,-15.9 16.226,-14.4 19.08,-14.4 v2(19.711,-13.769)
  Bottom Layer w0.2: U6A.7@11,-20.25 11,-19.231 10.936,-19.167 10.936,-18.713 11,-18.649 v1(11,-17.25)
LPUART1_TXB: R10B.1 U3B.2 U6B.7 | length 19.3
  Top Layer w0.2: U6B.7@10.25,21 10.25,20.116 10.657,19.71 v1(10.657,18.965)
  X w0.2: v1(10.657,18.965) 12.665,18.965 13.279,18.35 15.628,18.35 16.367,19.089 v1(16.367,20.25)
  Bottom Layer w0.2: v1(16.367,20.25) 16.95,20.25 17.5,19.7 17.5,18.6 19.365,16.735 19.365,14.45 U3B.2@19.365,12.201
NetC2A_1: C2A.1 D8A.3 U2A.1 | length 4.8
  Top Layer w0.2: C2A.1@7,-15.125 7.088,-15.037 8.338,-15.037 U2A.1@8.425,-14.95 8.711,-14.95 9.1,-14.561 D8A.3@9.1,-12.05
NetC2B_1: C2B.1 D8B.3 U2B.1 | length 4.7
  Bottom Layer w0.2: C2B.1@6.75,15.15 C2B.1@6.75,15.125 6.75,15.1 7.15,14.7 U2B.1@8.1,14.7 7.9,14.5 D8B.3@7.9,11.65
NetC14_1: C14.1 R13.1 R14.1 | length 2.7
  Top Layer w0.2: C14.1@18,5.225 18.075,5.3 R14.1@20.7,5.3
NetC19_1: C19.1 R16.1 R17.1 | length 3.8
  Bottom Layer w0.2: C19.1@-47.1,12.925 R17.1@-47.1,16.7
NetJ1A_1: J1A.1 Q6A.5 Q6A.6 Q6A.7 Q6A.8
NetJ1B_1: J1B.1 Q6B.5 Q6B.6 Q6B.7 Q6B.8
NetJ1C_1: J1C.1 Q6C.5 Q6C.6 Q6C.7 Q6C.8
NetJ1D_1: J1D.1 Q6D.5 Q6D.6 Q6D.7 Q6D.8
NetJ3A_1: J3A.1 Q1A.5 Q1A.6 Q1A.7 Q1A.8 R11A.2 R22A.2 | length 7.1
  Top Layer w0.2: J3A.1@1.475,-10.037 1.475,-8.497 R11A.2@4.025,-8.497
  Bottom Layer w0.2: J3A.1@1.475,-10.037 1.475,-9.797 R22A.2@4.225,-9.797
NetJ3B_1: J3B.1 Q1B.5 Q1B.6 Q1B.7 Q1B.8 R11B.2 R22B.2 | length 14.8
  Top Layer w0.2: Q1B.6@-14.925,-12.472 -14.925,-9.265 J3B.1@-11.75,-6.09 -11.75,-4.55 R11B.2@-9.2,-4.55
  Bottom Layer w0.2: J3B.1@-11.75,-6.09 -11.75,-5.85 R22B.2@-9,-5.85
NetJ3C_1: J3C.1 Q1C.5 Q1C.6 Q1C.7 Q1C.8 R11C.2 R22C.2 | length 14.8
  Top Layer w0.2: R11C.2@-3.05,8.5 -0.5,8.5 J3C.1@-0.5,10.04 2.675,13.215 Q1C.6@2.675,16.472
  Bottom Layer w0.2: R22C.2@-3.25,9.8 -0.5,9.8 J3C.1@-0.5,10.04
NetJ3D_1: J3D.1 Q1D.5 Q1D.6 Q1D.7 Q1D.8 R11D.2 R22D.2 | length 7.1
  Top Layer w0.2: R11D.2@-15.05,3.96 -12.5,3.96 J3D.1@-12.5,5.5
  Bottom Layer w0.2: R22D.2@-15.25,5.26 -12.5,5.26 J3D.1@-12.5,5.5
NetJ4A_1: J4A.1 J4A.3 J4A.5 J4A.7 J4A.9 J7A.4 SW1A.1 SW2A.1 | length 33.2
  Top Layer w0.2: J7A.4@-59.8,-17.9 -59.8,-19.6 -60.9,-20.7 -60.9,-25.8 -59.5,-27.2 SW2A.1@-59.5,-29.5 SW1A.1@-55,-29.5 -52.9,-29.5 -50.85,-27.45 J4A.1@-50.35,-27.45 -50.3,-27.4 -49.2,-27.4 -49,-27.2 -49,-26.5 ; J4A.3@-50.35,-26.45 -49.05,-26.45 -49,-26.5 ; J4A.5@-50.35,-25.45 -49.05,-25.45 -49,-25.5 ; J4A.7@-50.35,-24.45 -49.05,-24.45 -49,-24.4 ; J4A.9@-50.35,-23.45 -49.25,-23.45 -49,-23.7 -49,-24.4 ; -49,-26.5 -49,-25.5 ; -49,-25.5 -49,-24.4
NetJ4A_2: J4A.2 SW2A.2 | length 11.9
  Top Layer w0.2: SW2A.2@-59.5,-22.5 -59.5,-24.1 -56.65,-26.95 J4A.2@-50.35,-26.95
NetJ4A_4: J4A.4 SW1A.2 | length 6.5
  Top Layer w0.2: SW1A.2@-55,-22.5 -55,-23.2 -52.25,-25.95 J4A.4@-50.35,-25.95
NetJ4A_6: J4A.6 J7A.2 | length 10.2
  Top Layer w0.2: J7A.2@-55.8,-17.9 -55.8,-20.076 -53.766,-22.11 -53.766,-23.134 -51.975,-24.925 -50.375,-24.925 J4A.6@-50.35,-24.95
NetJ4A_8: J4A.8 J7A.3 | length 11.8
  Top Layer w0.2: v1(-52,-23.9) -51.975,-23.925 -50.375,-23.925 J4A.8@-50.35,-23.95
  Bottom Layer w0.2: J7A.3@-57.8,-17.9 -57.8,-21.1 -55,-23.9 v1(-52,-23.9)
NetJ4A_10: J4A.10 SB1A.2 | length 4
  Top Layer w0.2: SB1A.2@-50.4,-19.012 -50.35,-19.063 J4A.10@-50.35,-22.95
NetJ4B_1: J4B.1 J4B.3 J4B.5 J4B.7 J4B.9 J7B.4 SW1B.1 SW2B.1 | length 33.2
  Top Layer w0.2: J7B.4@-59.7,-1.8 -59.7,-3.5 -60.8,-4.6 -60.8,-9.7 -59.4,-11.1 SW2B.1@-59.4,-13.4 SW1B.1@-54.9,-13.4 -52.8,-13.4 -50.75,-11.35 J4B.1@-50.25,-11.35 -50.2,-11.3 -49.1,-11.3 -48.9,-11.1 -48.9,-10.4 ; J4B.3@-50.25,-10.35 -48.95,-10.35 -48.9,-10.4 ; J4B.5@-50.25,-9.35 -48.95,-9.35 -48.9,-9.4 ; J4B.7@-50.25,-8.35 -48.95,-8.35 -48.9,-8.3 ; J4B.9@-50.25,-7.35 -49.15,-7.35 -48.9,-7.6 -48.9,-8.3 ; -48.9,-10.4 -48.9,-9.4 ; -48.9,-9.4 -48.9,-8.3
NetJ4B_2: J4B.2 SW2B.2 | length 11.9
  Top Layer w0.2: SW2B.2@-59.4,-6.4 -59.4,-8 -56.55,-10.85 J4B.2@-50.25,-10.85
NetJ4B_4: J4B.4 SW1B.2 | length 6.5
  Top Layer w0.2: SW1B.2@-54.9,-6.4 -54.9,-7.1 -52.15,-9.85 J4B.4@-50.25,-9.85
NetJ4B_6: J4B.6 J7B.2 | length 10.2
  Top Layer w0.2: J7B.2@-55.7,-1.8 -55.7,-3.976 -53.695,-5.981 -53.695,-7.005 -51.9,-8.8 -51.875,-8.825 -50.275,-8.825 J4B.6@-50.25,-8.85
NetJ4B_8: J4B.8 J7B.3 | length 11.8
  Top Layer w0.2: v1(-51.9,-7.8) -51.875,-7.825 -50.275,-7.825 J4B.8@-50.25,-7.85
  Bottom Layer w0.2: J7B.3@-57.7,-1.8 -57.7,-5 -54.9,-7.8 v1(-51.9,-7.8)
NetJ4B_10: J4B.10 SB1B.2 | length 3.9
  Top Layer w0.2: J4B.10@-50.25,-6.85 -50.25,-3.062 SB1B.2@-50.2,-3.012
NetJ6_3: J6.3 R17.2 TP17.1 U5.7 | length 7
  Top Layer w0.2: U5.7@-47.599,16.335 -46.966,16.335 -46.601,16.7 J6.3@-44.2,16.7
  Bottom Layer w0.2: R17.2@-45.7,16.7 J6.3@-44.2,16.7 TP17.1@-42.3,16.7
NetJ6_4: J6.4 R16.2 TP18.1 U5.6 | length 7
  Top Layer w0.2: U5.6@-47.599,15.065 -46.966,15.065 -46.601,14.7 J6.4@-44.2,14.7
  Bottom Layer w0.2: R16.2@-45.7,14.7 J6.4@-44.2,14.7 TP18.1@-42.3,14.7
NetJ7A_1: J7A.1 SB1A.1 | length 3.4
  Top Layer w0.2: J7A.1@-53.8,-17.9 -53.712,-17.812 SB1A.1@-50.4,-17.812
NetJ7B_1: J7B.1 SB1B.1 | length 3.5
  Top Layer w0.2: J7B.1@-53.7,-1.8 -53.687,-1.813 SB1B.1@-50.2,-1.813
NetJ8A_3: J8A.3 TP10A.1 | length 4.8
  Top Layer w0.2: J8A.3@8.102,-23.476 9.3,-22.279 v1(9.3,-20.219)
  Bottom Layer w0.2: TP10A.1@8.3,-20.1 8.38,-20.18 9.262,-20.18 v1(9.3,-20.219)
NetJ8A_6: J8A.6 TP11A.1 | length 4.2
  Top Layer w0.2: v1(3.7,-25.5) 4.616,-24.584 4.925,-24.584 5.39,-24.119 6.05,-24.119 6.437,-24.505 7.062,-24.505 J8A.6@7.143,-24.586
NetJ8B_3: J8B.3 TP10B.1 | length 4.7
  Top Layer w0.2: v1(4.7,25.6) 5.781,25.6 5.88,25.698 7.702,25.698 8.75,24.65 J8B.3@8.75,24.52
NetJ8B_6: J8B.6 TP11B.1 | length 5.6
  Top Layer w0.2: TP11B.1@5.5,18.5 5.5,20.778 7.48,22.758 J8B.6@7.48,23.25
NetJ9_2: J9.2 R15.1 TP19.1 U5.2 | length 8.3
  Top Layer w0.2: J9.2@-62.4,16.6 -62.2,16.4 -58.066,16.4 U5.2@-58.001,16.335
  Bottom Layer w0.2: v1(-58.65,16.5) -59.088,16.938 -59.088,17.9 -59.388,18.2 R15.1@-59.4,18.2 -59.3,18.3 TP19.1@-57.7,18.3
NetJ9_3: J9.3 TP20.1 U5.3 | length 6.2
  Top Layer w0.2: J9.3@-62.4,14.6 -59.021,14.6 -58.556,15.065 U5.3@-58.001,15.065
  Bottom Layer w0.2: TP20.1@-58.8,13 -58.8,14.612
  other v1: -58.65,14.9
NetLED1A_2: LED1A.2 R5A.2 | length 0.1
  Bottom Layer w0.2: v1(-5.75,-24.5) R5A.2@-5.6,-24.5
NetLED1A_3: LED1A.3 R6A.2 | length 1.6
  Top Layer w0.2: R6A.2@-8.75,-24.65 -7.4,-24.65 LED1A.3@-7.25,-24.5
NetLED1A_4: LED1A.4 R7A.2 | length 1.6
  Top Layer w0.2: LED1A.4@-7.25,-21.5 R7A.2@-7.25,-19.95
NetLED1B_2: LED1B.2 R5B.2 | length 2.4
  Top Layer w0.2: R5B.2@-8.5,24.1 -8.5,24.95 -7.05,24.95 LED1B.2@-7,25
NetLED1B_3: LED1B.3 R6B.2 | length 1.6
  Top Layer w0.2: LED1B.3@-5.5,25 -5.3,25.2 R6B.2@-4,25.2
NetLED1B_4: LED1B.4 R7B.2 | length 1.7
  Top Layer w0.2: R7B.2@-5.5,20.3 LED1B.4@-5.5,22
NetLED2A_2: LED2A.2 R22A.1 | length 1.4
  Bottom Layer w0.2: R22A.1@4.225,-11.197 4.225,-12.537 LED2A.2@4.275,-12.537
NetLED2B_2: LED2B.2 R22B.1 | length 1.4
  Bottom Layer w0.2: R22B.1@-9,-7.25 -9,-8.59 LED2B.2@-8.95,-8.59
NetLED2C_2: LED2C.2 R22C.1 | length 1.4
  Bottom Layer w0.2: LED2C.2@-3.3,12.54 -3.25,12.54 R22C.1@-3.25,11.2
NetLED2D_2: LED2D.2 R22D.1 | length 1.4
  Bottom Layer w0.2: LED2D.2@-15.3,8 -15.25,8 R22D.1@-15.25,6.66
NetQ1A_4: Q1A.4 Q3A.3 R1A.2 | length 7.4
  Top Layer w0.2: Q1A.4@-1.05,-19.978 -1.05,-19.975 v1(-1.025,-19.95)
  Bottom Layer w0.2: v1(-3.059,-15.17) -3.059,-15.251 -2.725,-15.585 R1A.2@-2.725,-17.837 -2.675,-17.837 -1.082,-19.43 -1.082,-19.893 v1(-1.025,-19.95) ; v1@-3.025,-15.17 -3.025,-15.136 -2.487,-14.597 Q3A.3@-1.525,-14.597
NetQ1B_4: Q1B.4 Q3B.3 R1B.2 | length 7.1
  Top Layer w0.2: v1(-14.275,-16) Q1B.4@-14.275,-15.978
  Bottom Layer w0.2: R1B.2@-15.95,-13.89 -15.95,-10.767 -15.833,-10.65 Q3B.3@-14.75,-10.65 ; R1B.2@-15.9,-13.9 -15.89,-13.9 -14.332,-15.458 v1@-14.332,-15.943
NetQ1C_4: Q1C.4 Q3C.3 R1C.2 | length 7.2
  Top Layer w0.2: v1(2,19.975) 2.003,19.978 Q1C.4@2.025,19.978
  Bottom Layer w0.2: v1(2,19.975) 2.057,19.918 2.057,19.433 3.65,17.84 R1C.2@3.7,17.84 3.775,17.765 3.775,15.075 3.3,14.6 Q3C.3@2.5,14.6
NetQ1D_4: Q1D.4 Q3D.3 R1D.2 | length 8
  Top Layer w0.2: Q1D.4@-9.975,15.463 v1(-9.975,15.475)
  Bottom Layer w0.2: v1(-9.975,15.475) -9.975,14.925 -8.35,13.3 R1D.2@-8.3,13.3 -8.3,10.858 v1(-7.966,10.858) -8,10.824 -8,10.06 Q3D.3@-9.5,10.06
NetSB6A_2: SB6A.2 U6A.25 | length 2.1
  Bottom Layer w0.2: U6A.25@17.25,-13.2 SB6A.2@17.25,-11.1
NetSB6B_2: SB6B.2 U6B.25 | length 2.4
  Top Layer w0.2: U6B.25@16.5,13.95 16.85,13.95 17.9,12.9 SB6B.2@18.488,12.9
NetTP3A_1: TP3A.1 U6A.22 | length 17.1
  Top Layer w0.2: v1(5.975,-14.3) 5.975,-14.246 5.875,-14.146 5.875,-10.725 TP3A.1@6.6,-10
  X w0.2: v1(5.975,-14.3) 6.013,-14.338 6.504,-14.338 7.015,-14.85 10.211,-14.85 10.611,-14.45 11.315,-14.45 11.832,-14.968 12.648,-14.968 13.101,-15.42 v1(13.101,-15.434)
  Bottom Layer w0.2: v1(13.101,-15.434) 13.718,-15.434 14.2,-14.953 U6A.22@14.2,-11.75
NetTP3B_1: TP3B.1 U6B.22 | length 3.4
  Top Layer w0.2: U6B.22@13.45,12.5 13.6,12.35 13.6,11.876 13.876,11.6 16.1,11.6 TP3B.1@16.2,11.7
NetTP4A_1: TP4A.1 U6A.26 | length 1.4
  Bottom Layer w0.2: U6A.26@17.25,-14 18.6,-14
NetTP4B_1: TP4B.1 U6B.26 | length 3.3
  Top Layer w0.2: U6B.26@16.5,14.75 16.55,14.7 19.725,14.7 TP4B.1@19.775,14.65
NetTP5A_1: TP5A.1 U6A.29 | length 2.7
  Bottom Layer w0.2: U6A.29@17.25,-16.4 19.8,-16.4 TP5A.1@19.9,-16.5
NetTP5B_1: TP5B.1 U6B.29 | length 2
  Top Layer w0.2: v1(15.565,17.4) 15.646,17.4 15.746,17.3 16.35,17.3 U6B.29@16.5,17.15
  Bottom Layer w0.2: v1(15.565,17.4) 15.615,17.45 16.45,17.45 TP5B.1@16.5,17.5
NetTP6A_1: TP6A.1 U6A.30 | length 1.6
  Bottom Layer w0.2: U6A.30@17.25,-17.2 17.35,-17.3 18.7,-17.3 TP6A.1@18.8,-17.4
NetTP6B_1: TP6B.1 U6B.30 | length 2.8
  Top Layer w0.2: v1(15.4,18.9) 15.457,18.843 15.457,18.518 15.776,18.2 15.9,18.2 16.15,17.95 U6B.30@16.5,17.95
  Bottom Layer w0.2: v1(15.4,18.9) 15.45,18.95 16.45,18.95 TP6B.1@16.5,19
NetTP7A_1: pad.1@5.8,-6.7 TP7A.1 U6A.21 | length 15.8
  Top Layer w0.2: pad.1@5.8,-6.7 5.931,-6.7 8.1,-8.869 TP7A.1@8.1,-10 8.1,-11.305 7.7,-11.705 v1(7.7,-13.107)
  X w0.2: v1(7.7,-13.107) 7.738,-13.145 8.388,-13.145 9.549,-14.307 10.046,-14.307 10.654,-13.7 v1(13.125,-13.7)
  Bottom Layer w0.2: v1(13.125,-13.7) 13.125,-13.646 13.4,-13.371 U6A.21@13.4,-11.75
NetTP7B_1: TP7B.1 U6B.21 | length 2.3
  Top Layer w0.2: v1(12.6,13.361) 12.625,13.336 12.625,12.525 U6B.21@12.65,12.5
  Bottom Layer w0.2: TP7B.1@12.4,12 12.543,12.143 12.543,13.304 v1(12.6,13.361)
NetTP8A_1: TP8A.1 U6A.27 | length 2.7
  Bottom Layer w0.2: U6A.27@17.25,-14.8 17.3,-14.75 19.85,-14.75 TP8A.1@19.9,-14.7
NetTP8B_1: TP8B.1 U6B.27 | length 1.6
  Top Layer w0.2: U6B.27@16.5,15.55 16.525,15.525 18.075,15.525 TP8B.1@18.1,15.5
NetTP9A_1: TP9A.1 U6A.28 | length 4.3
  Bottom Layer w0.2: U6A.28@17.25,-15.6 17.305,-15.545 18.15,-15.545 18.545,-15.15 19.219,-15.15 19.569,-15.5 TP9A.1@21.2,-15.5
NetTP9B_1: TP9B.1 U6B.28 | length 3.3
  Top Layer w0.2: U6B.28@16.5,16.35 16.506,16.344 19.744,16.344 TP9B.1@19.75,16.337
NetTP13A_1: TP13A.1 U6A.2 | length 1.1
  Bottom Layer w0.2: U6A.2@15,-20.25 15,-21.044 15.2,-21.244 v1(15.2,-21.3)
NetTP13B_1: TP13B.1 U6B.2 | length 1.5
  Top Layer w0.2: TP13B.1@14,22.4 14.125,22.275 14.125,21.125 U6B.2@14.25,21
NRSTA: R8A.1 U1A.1 U6A.4 | length 6.3
  Top Layer w0.2: v1(9.95,-21.5) 10.555,-20.895 v1(13.5,-20.895)
  Bottom Layer w0.2: U1A.1@9.4,-21.55 9.45,-21.5 v1(9.95,-21.5) ; U6A.4@13.4,-20.25 13.5,-20.35 v1(13.5,-20.895) 13.8,-21.195 R8A.1@13.8,-22
NRSTB: R8B.1 U1B.1 U6B.4 | length 6.8
  Top Layer w0.2: U6B.4@12.65,21 12.65,22.096 12.9,22.346 v1(12.9,22.4)
  Bottom Layer w0.2: U1B.1@9.7,22.05 9.85,22.2 9.85,22.595 10.205,22.95 12.595,22.95 12.8,22.745 12.8,22.554 12.9,22.454 v1(12.9,22.4) R8B.1@14,22.4
PRIMARY_OUT_EN_1: Q3A.1 R3A.2 U6A.14 | length 22.9
  X w0.2: v1(-1.712,-8.8) -0.627,-8.8 -0.092,-8.265 3.286,-8.265 3.618,-8.597 v1(7.05,-8.597)
  Y w0.2: v1(-1.725,-12.437) -1.712,-12.425 v1(-1.712,-8.8) ; v1(7.05,-8.597) 7.088,-8.635 7.088,-9.17 7.365,-9.447 7.365,-12.594 7.1,-12.859 7.1,-13.4 7.164,-13.464 7.164,-14.096 7.264,-14.196 v1(7.264,-14.25)
  Bottom Layer w0.2: Q3A.1@-2.475,-12.437 R3A.2@-2.475,-10.747 ; Q3A.1@-2.475,-12.397 -2.435,-12.437 v1(-1.725,-12.437) ; v1(7.264,-14.25) 7.318,-14.25 7.768,-14.7 8.65,-14.7 U6A.14@8.75,-14.8
PRIMARY_OUT_EN_2: Q3B.1 R3B.2 U6A.15 | length 34.9
  X w0.2: v1(-16.861,-7.95) -16.839,-7.928 -10.871,-7.928 -10.798,-8 v1(-2.4,-8)
  Y w0.2: v1(-2.4,-8) -2.346,-8 -2.146,-8.2 3.397,-8.2 3.6,-7.997 7.299,-7.997 7.65,-8.348 7.65,-8.931 8.3,-9.581 8.3,-13.356 7.949,-13.707 7.947,-13.707 7.854,-13.8 v1(7.8,-13.8)
  Bottom Layer w0.2: v1(-16.861,-7.95) -16.1,-7.95 -15.7,-8.35 Q3B.1@-15.7,-8.45 R3B.2@-15.7,-6.8 ; v1(7.8,-13.8) 7.854,-13.8 7.954,-13.9 8.65,-13.9 U6A.15@8.75,-14
PRIMARY_OUT_SENSE_1: C13A.1 R11A.1 R12A.2 U6A.12 | length 12.3
  Top Layer w0.2: R11A.1@5.425,-8.497 5.425,-15.737 5.375,-15.737 5.375,-16.997 v1(6.072,-16.3)
  Bottom Layer w0.2: v1(6.072,-16.3) 6.154,-16.3 6.254,-16.4 U6A.12@8.75,-16.4
PRIMARY_OUT_SENSE_2: C13B.1 R11B.1 R12B.2 U6A.13 | length 26.9
  Top Layer w0.2: C13B.1@-7.875,-13.05 C13B.1@-7.85,-13.05 ; R11B.1@-7.8,-4.55 -7.8,-11.79 -7.85,-11.79 C13B.1@-7.85,-13.05 ; v1(-6.849,-14.051) C13B.1@-7.85,-13.05
  X w0.2: v1(-6.849,-14.051) -0.978,-14.051 0.741,-15.77 2.209,-15.77 2.993,-14.986 v1(6.15,-14.986)
  Bottom Layer w0.2: v1(6.15,-14.986) 6.764,-15.6 U6A.13@8.75,-15.6
PRIMARY_VBATT_1: D8A.1 Q1A.1 Q1A.2 Q1A.3 Q6A.1 Q6A.2 Q6A.3 R1A.1 R2A.2 | length 23.2
  Top Layer w0.2: Q6A.1@-1.05,-20.995 -1.007,-21.037 R2A.2@0.575,-21.037 0.575,-20.289 -0.325,-19.389 -0.325,-18.105 -0.1,-17.88 v1(-0.1,-16.54) ; D8A.1@11,-13 11.45,-13 11.6,-13.15 11.6,-16.146 11.216,-16.53 v1(11.216,-16.584)
  X w0.2: v1(-0.1,-16.54) -0.043,-16.597 0.296,-16.597 0.298,-16.6 5.595,-16.6 5.845,-16.85 6.3,-16.85 6.55,-16.6 11.2,-16.6 v1(11.216,-16.584)
  Bottom Layer w0.2: v1(-3,-19.95) -3,-19.512 R1A.1@-2.725,-19.237
PRIMARY_VBATT_2: D8A.2 Q1B.1 Q1B.2 Q1B.3 Q6B.1 Q6B.2 Q6B.3 R1B.1 R2B.2 | length 33.2
  Top Layer w0.2: -14.525,-17 -14.435,-17.09 v1(-12.65,-17.09) ; v1(9.1,-10.6) 9.181,-10.6 9.481,-10.9 10.8,-10.9 D8A.2@11,-11.1
  X w0.2: v1(-13.253,-12) -11.69,-12 -11.687,-12 -7.032,-11.932 -6.86,-11.76 3.161,-11.76 3.871,-11.05 8.65,-11.05 v1(9.1,-10.6)
  Y w0.2: v1(-13.253,-12) -13.253,-12.081 -13.5,-12.329 -13.5,-16.24 v1(-12.65,-17.09)
  Bottom Layer w0.2: v1(-15.95,-15.975) R1B.1@-15.95,-15.29
PRIMARY_VBATT_SENSE_1: C12A.1 R2A.1 R4A.2 U6A.10 | length 8.8
  Top Layer w0.2: R2A.1@1.975,-21.037 3.548,-21.037 3.775,-20.81 R4A.2@3.775,-20.237 ; R4A.2@3.775,-20.137 4.975,-20.137 4.975,-20.097 5.475,-19.597 5.499,-19.597 5.947,-19.15 5.947,-18.653 v1(6,-18.6)
  Bottom Layer w0.2: v1(6,-18.6) 6,-18.519 6.204,-18.315 6.204,-18.167 6.345,-18.026 8.724,-18.026 U6A.10@8.75,-18
PRIMARY_VBATT_SENSE_2: C12B.1 R2B.1 R4B.2 U6A.11 | length 25.1
  Top Layer w0.2: R2B.1@-11.25,-17.09 v1(-9.45,-17.09) R4B.2@-9.45,-16.29 ; R4B.2@-9.45,-16.19 -8.25,-16.19 C12B.1@-8.25,-16.175
  X w0.2: v1(-9.45,-17.09) 4.64,-17.09 5.35,-17.8 8.046,-17.8 8.646,-17.2 v1(10,-17.2)
  Bottom Layer w0.2: U6A.11@8.75,-17.2 v1(10,-17.2)
RST_SWA: C8A.1 J5A.9 U1A.3 | length 36.4
  Top Layer w0.2: J5A.9@-17.95,-9.7 v1(-17.017,-9.7)
  X w0.2: v1(-17.017,-9.7) -17.017,-11.58 -15.297,-13.3 -10.415,-13.3 -8.665,-15.05 v1(-5.25,-15.05)
  Y w0.2: v1(-5.25,-15.05) -0.9,-19.4 -0.797,-19.4 -0.475,-19.722 -0.475,-19.825 v1(3.1,-23.4)
  Bottom Layer w0.2: v1(3.1,-23.4) 3.75,-24.05 7.574,-24.05 8.174,-23.45 U1A.3@9.4,-23.45 9.55,-23.45 9.9,-23.1 10.05,-23.1 10.1,-23.05 10.5,-23.05 10.8,-22.75 C8A.1@10.8,-22.725
RST_SWB: C8B.1 J5B.9 U1B.3 | length 46.6
  Top Layer w0.2: v1(-19.1,6.2) J5B.9@-17.95,6.2
  X w0.2: v1(-19.1,6.2) -15.5,6.2 -14.2,7.5 -10.9,7.5 -9.6,8.8 v1(-6,8.8) ; v1(-6.5,20.5) -5.95,21.05 3.125,21.05 3.622,21.547 5.153,21.547 5.85,20.85 7.25,20.85 v1(7.8,21.4)
  Y w0.2: v1(-6.5,20.5) -6.5,18.649 -6.25,18.399 -6.25,14.754 -5.95,14.454 -5.95,8.85 v1(-6,8.8) ; v1@7.8,21.319 v1(7.8,21.4)
  Bottom Layer w0.2: C8B.1@4.7,22.575 4.7,22.55 5.2,22.05 U1B.3@7.8,22.05 v1(7.8,21.4)
SECONDARY_OUT_EN_1: Q3C.1 R3C.2 U6B.14 | length 8.5
  Top Layer w0.2: v1(5,15.2) 5.078,15.2 5.428,15.55 U6B.14@8,15.55
  Y w0.2: v1(2.7,12.44) 4.48,14.22 4.48,14.68 v1(5,15.2)
  Bottom Layer w0.2: R3C.2@3.45,10.75 Q3C.1@3.45,12.4
SECONDARY_OUT_EN_2: Q3D.1 R3D.2 U6B.15 | length 26.5
  Top Layer w0.2: v1(5.9,14.828) 5.939,14.789 7.961,14.789 U6B.15@8,14.75
  X w0.2: v1(-9.3,7.9) -3.626,7.9 -3.208,8.318 v1@5.9,8.318
  Y w0.2: v1(5.9,8.3) v1(5.9,14.828)
  Bottom Layer w0.2: v1(-9.3,7.9) -8.59,7.9 Q3D.1@-8.55,7.86 ; R3D.2@-8.55,6.21 Q3D.1@-8.55,7.9
SECONDARY_OUT_SENSE_1: C13C.1 R11C.1 R12C.2 U6B.12 | length 21.9
  Top Layer w0.2: R11C.1@-4.45,8.5 R12C.2@-4.45,15.74 ; R12C.2@-4.45,15.75 -4.45,16.995 -3.695,17.75 v1(-2,17.75) ; v1(4.9,17.7) 6.25,17.7 6.8,17.15 U6B.12@8,17.15
  Y w0.2: v1(-2,17.75) -1.371,17.75 -0.871,17.25 1.749,17.25 2.199,17.7 v1(4.9,17.7)
SECONDARY_OUT_SENSE_2: C13D.1 R11D.1 R12D.2 U6B.13 | length 46.3
  Top Layer w0.2: R11D.1@-16.45,3.96 -16.45,11.2 -16.4,11.2 -16.4,12.46 C13D.1@-16.375,12.46 ; U6B.13@8,16.35 8.025,16.375 9.275,16.375 v1(9.3,16.4)
  X w0.2: v1(-13.68,15.54) -13.041,15.54 -12.871,15.71 -11.36,15.71 -10.325,14.675 -2.827,14.675 -1.379,16.122 0.5,16.122 0.722,15.9 7.55,15.9 8,16.35 9.25,16.35 v1(9.3,16.4)
  Y w0.2: v1(-16.5,4.8) -16.5,12.922 -15.22,14.202 -15.018,14.202 v1(-13.68,15.54)
SECONDARY_VBATT_1: D8B.1 Q1C.1 Q1C.2 Q1C.3 Q6C.1 Q6C.2 Q6C.3 R1C.1 R2C.2 | length 13.9
  Top Layer w0.2: R2C.2@0.4,21.04 0.443,20.997 Q6C.1@2.025,20.997
  Y w0.2: v1(3.975,19.975) 5.175,19.975 5.991,19.159 5.991,16.531 7.05,15.472 7.05,12.579 6.6,12.129 v1(6.6,10.7)
  Bottom Layer w0.2: R1C.1@3.7,19.24 3.975,19.515 v1(3.975,19.975)
SECONDARY_VBATT_2: D8B.2 Q1D.1 Q1D.2 Q1D.3 Q6D.1 Q6D.2 Q6D.3 R1D.1 R2D.2 | length 19.4
  Top Layer w0.2: R2D.2@-11.6,16.5 -11.597,16.497 Q6D.1@-10,16.497
  X w0.2: v1(-7.975,15.397) -7.961,15.411 -5.539,15.411 v1(-5.525,15.425)
  Y w0.2: v1(-5.525,15.425) -5.55,15.4 -5.55,13.35 -4.09,11.89 4.59,11.89 v1(5.3,12.6)
  Bottom Layer w0.2: R1D.1@-8.3,14.7 -8.275,14.7 -7.975,15 v1(-7.975,15.397) ; v1(5.3,12.6) D8B.2@6,12.6
SECONDARY_VBATT_SENSE_1: C12C.1 R2C.1 R4C.2 U6B.10 | length 16.5
  Top Layer w0.2: C12C.1@-4,20.125 -4,20.14 R4C.2@-2.8,20.14 ; R4C.2@-2.8,20.24 -2.8,21.04 R2C.1@-1,21.04 v1(-1,22.1) ; v1(6.9,21.4) 6.9,21.346 7.05,21.196 7.05,19.155 7.355,18.85 7.9,18.85 U6B.10@8,18.75
  X w0.2: v1(-1,22.1) -0.972,22.072 5.314,22.072 5.985,21.4 v1(6.9,21.4)
SECONDARY_VBATT_SENSE_2: C12D.1 R2D.1 R4D.2 U6B.11 | length 30.6
  Top Layer w0.2: C12D.1@-16,15.585 -16,15.6 R4D.2@-14.8,15.6 ; R4D.2@-14.8,15.7 -14.8,16.5 -14.1,16.5 ; v1(-14.1,16.1) -14.1,16.5 ; R2D.1@-13,16.5 -14.1,16.5 ; U6B.11@8,17.95 8.025,17.975 9.475,17.975 v1(9.5,18)
  X w0.2: v1(-14.1,16.1) -14.09,16.11 -9.832,16.11 -9.67,15.947 -7.625,15.947 -7.05,16.522 0.209,16.522 0.687,17 3.1,17 3.7,17.6 4.189,17.6 4.639,17.15 5.128,17.15 5.8,17.822 5.8,17.833 5.917,17.95 9.45,17.95 v1(9.5,18)
SWCLKA: J8A.4 U6A.24 | length 25.5
  X w0.2: v1(6.475,-11.6) 14.9,-11.6 v1(15.8,-10.7)
  Y w0.2: v1(6.475,-11.6) 5.15,-12.925 5.15,-19.922 8.26,-23.032 v1(8.26,-24.535)
  Bottom Layer w0.2: U6A.24@15.8,-11.75 v1(15.8,-10.7)
SWCLKB: J8B.4 U6B.24 | length 15.9
  Top Layer w0.2: J8B.4@8.75,23.25 8.75,20.331 9.006,20.075 v1(9.006,19.994) ; v1(11.7,15.2) 13.383,15.2 15.05,13.533 U6B.24@15.05,12.5
  X w0.2: v1(9.4,15.3) 9.454,15.3 9.554,15.2 v1(11.7,15.2)
  Y w0.2: v1(9.006,19.994) 9.006,19.94 8.838,19.772 8.838,16.787 8.7,16.649 8.7,16 v1(9.4,15.3)
SWDIOA: J8A.2 U6A.23 | length 19
  Y w0.2: v1(9.53,-24.535) 9.52,-24.525 9.52,-23.88 10.975,-22.425 11.028,-22.425 11.35,-22.103 11.35,-22.05 13.05,-20.35 13.05,-17.811 12.226,-16.987 12.226,-12.125 12.5,-11.851 v1(12.5,-10.7)
  Bottom Layer w0.2: v1(12.5,-10.7) 14.495,-10.7 14.9,-11.105 14.9,-11.65 U6A.23@15,-11.75
SWDIOB: J8B.2 U6B.23 | length 14.9
  Top Layer w0.2: J8B.2@10.02,23.25 10.133,23.137 10.413,23.137 10.462,23.088 11.938,23.088 v1(12.4,23.55) ; v1(12.4,14.461) 12.418,14.443 12.95,14.443 13.05,14.343 13.232,14.343 14.25,13.325 U6B.23@14.25,12.5
  Y w0.2: v1(12.4,14.461) 12.4,22.122 12.35,22.172 12.35,22.628 12.4,22.678 v1(12.4,23.55)
USART2_RXA: J5A.5 R37A.1 U6A.20 | length 59.8
  Top Layer w0.2: v1(-19.4,-7.7) J5A.5@-17.95,-7.7
  X w0.2: v1(-17.4,-19.5) -15.859,-19.5 -13.559,-21.8 -11.379,-21.8 -10.329,-20.75 -3.697,-20.75 -3.447,-20.5 -2.114,-20.5 -1.714,-20.9 3.897,-20.9 4.029,-20.769 10.831,-20.769 v1(12.5,-19.1)
  Y w0.2: v1(-19.4,-7.7) -19.4,-8.439 -19.75,-8.789 -19.75,-17.15 v1(-17.4,-19.5)